# EAGLE board Stator_PCB_ver_2.2 (EAGLE 7.4.0)
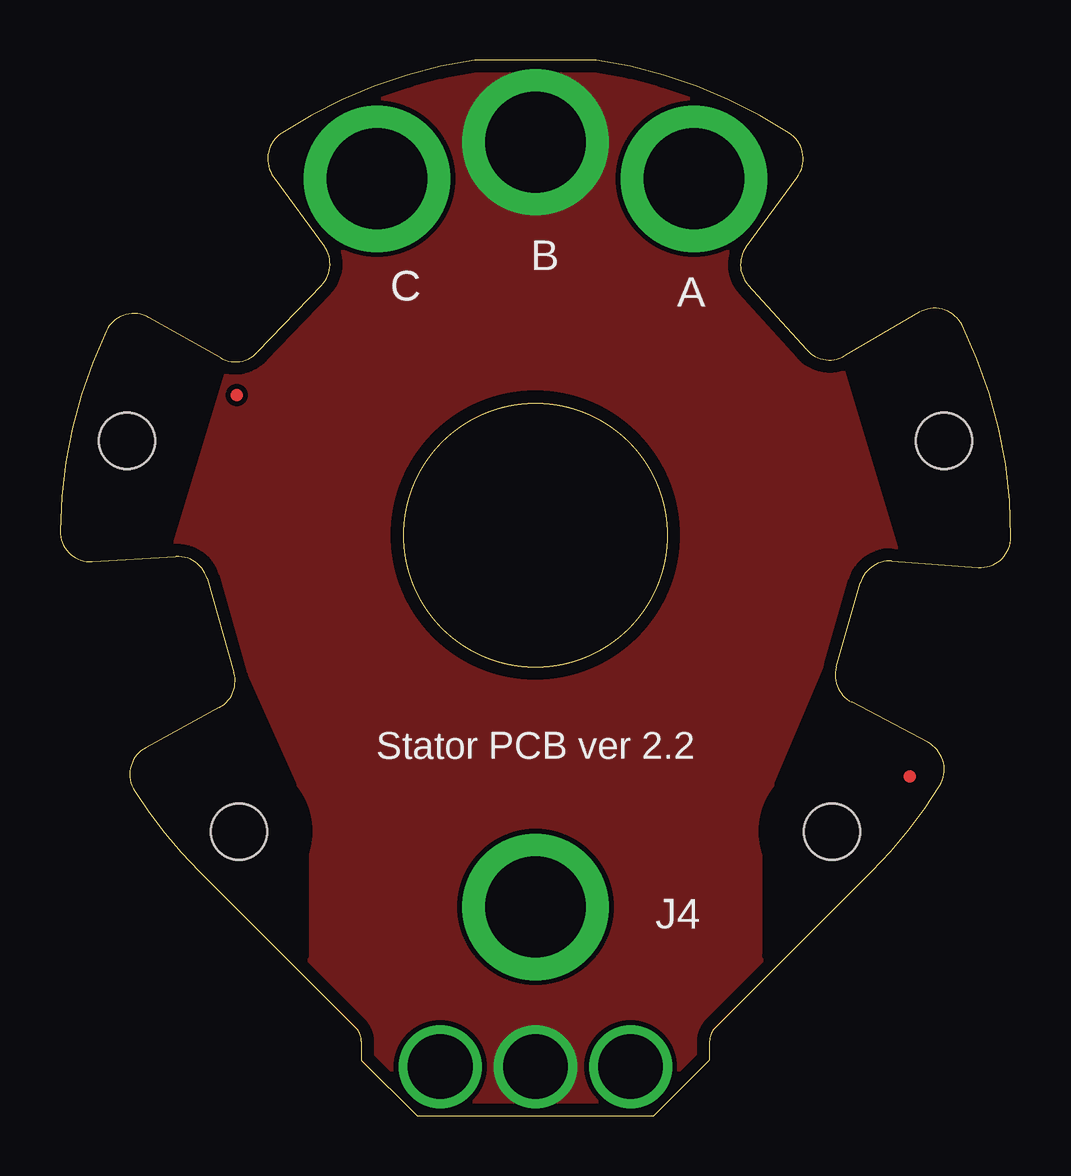
[diagram p0: board, top side]
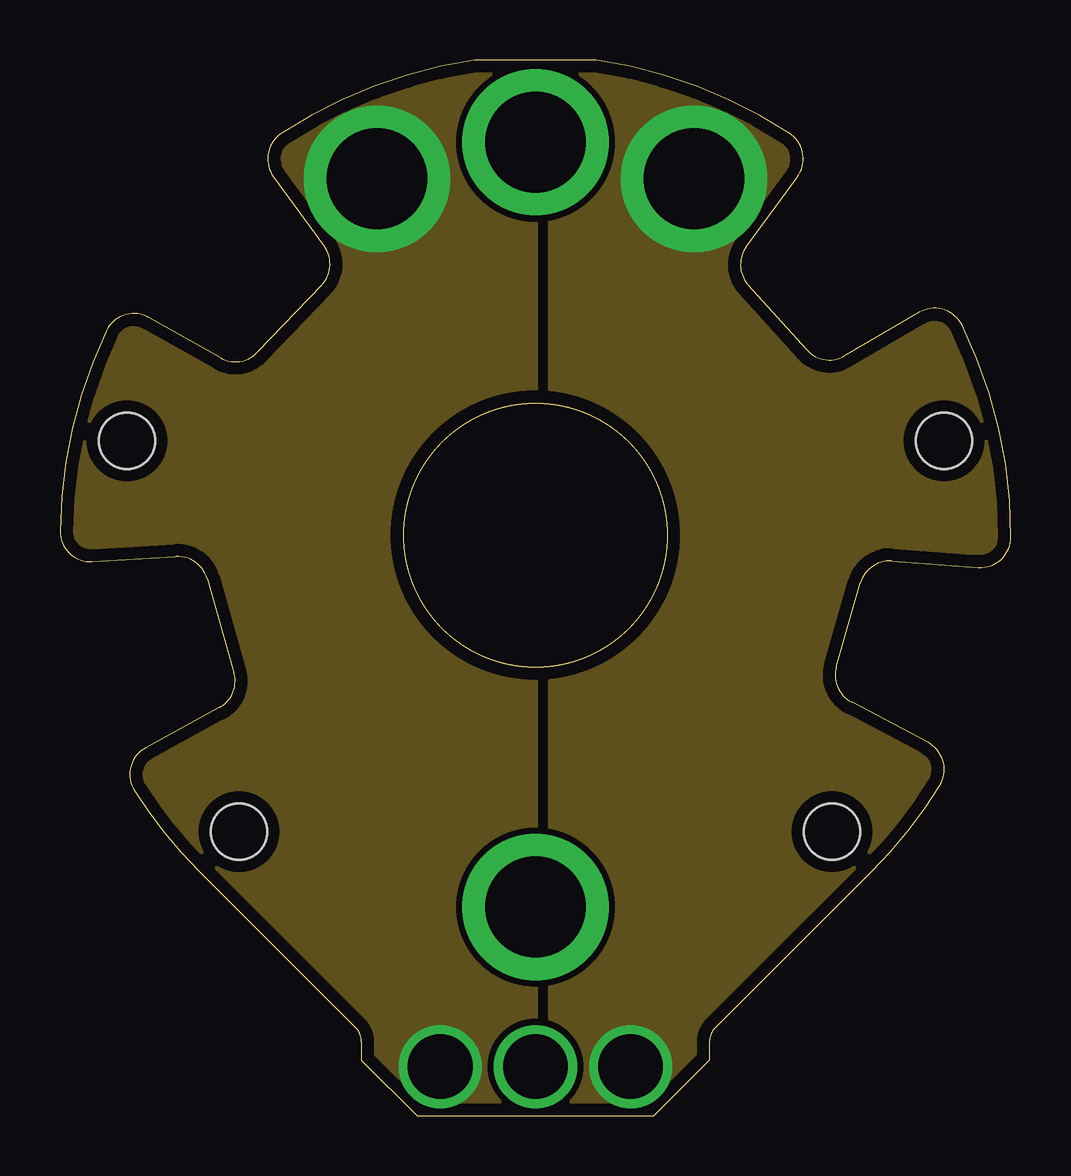
[diagram p1: board, inner layer Route2]
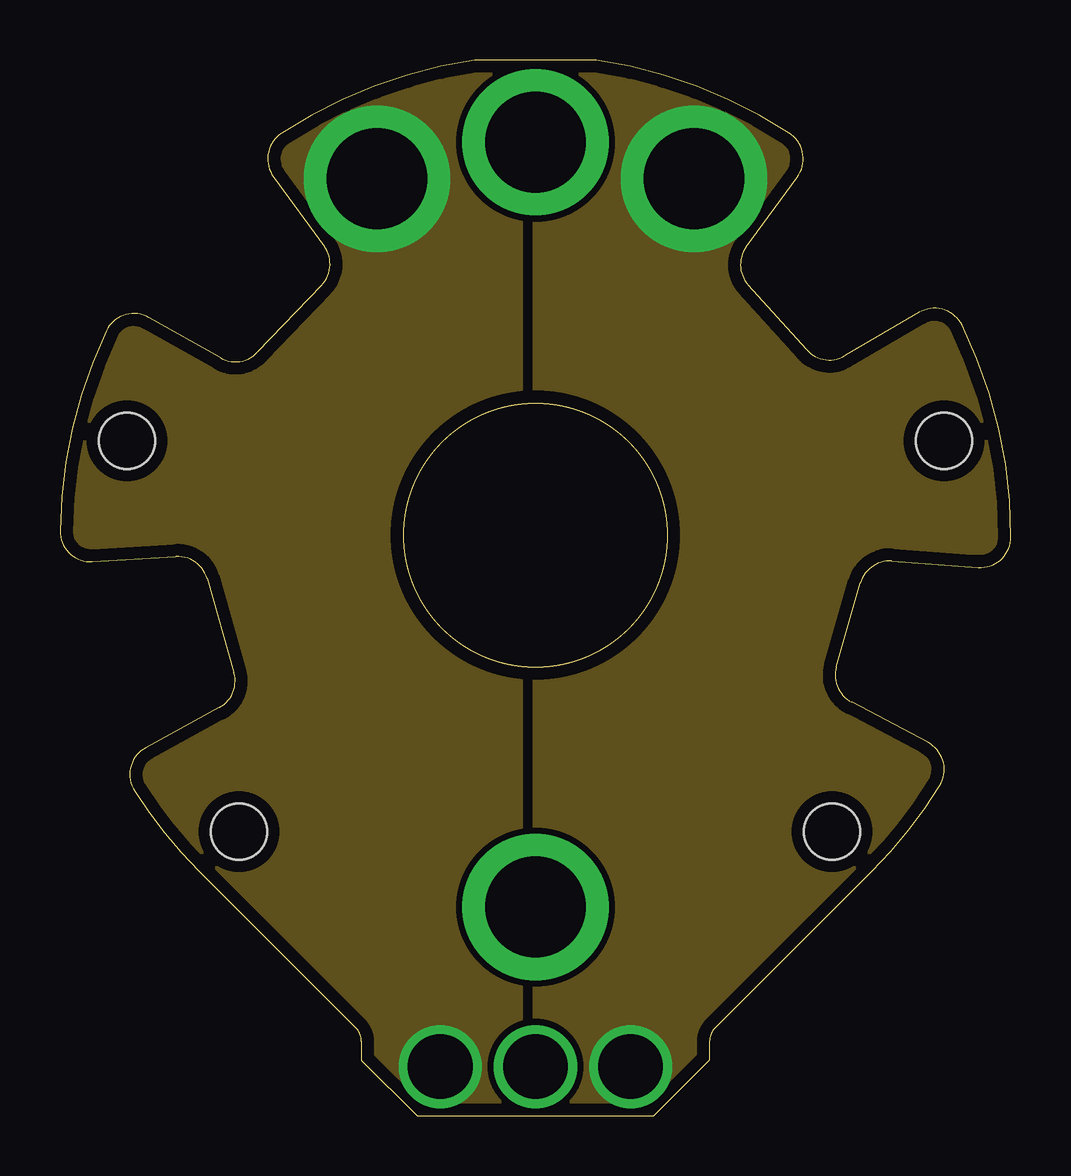
[diagram p2: board, inner layer Route3]
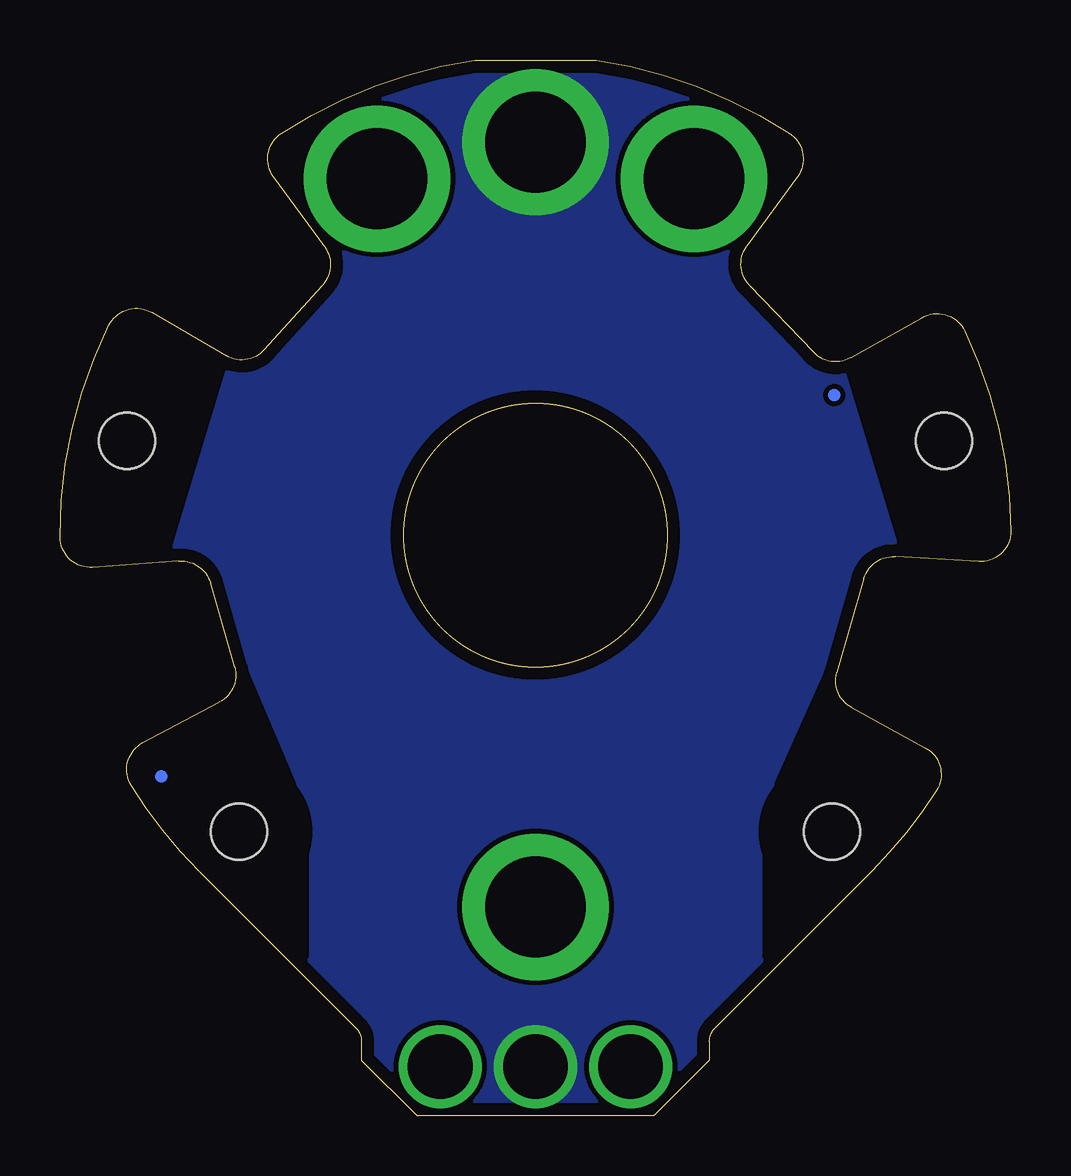
[diagram p3: board, bottom side, seen from below]

Size 39.62 x 44.01 mm. Coordinates in mm from the lower left corner, seen from the top.
Outline: 6.13,22.39 7.25,18.48 arc-77 6.64,17.01 3.57,15.34 arc94 3.11,13.54 arc12 5.8,10.19 12.33,3.66 arc-45 12.56,3.1 12.56,2.32 14.88,0 24.74,0 27.06,2.32 27.06,3.1 arc-45 27.29,3.66 33.82,10.19 arc13 36.65,13.76 arc94 36.17,15.55 32.98,17.24 arc-78 32.35,18.71 33.35,22.2 arc-78 34.67,23.12 38.26,22.86 arc94 39.62,24.12 arc26 37.58,32.95 arc94 35.81,33.49 32.69,31.68 arc-78 31.11,31.92 28.68,34.62 arc-78 28.6,36.22 30.72,39.13 arc94 30.38,40.96 arc24 22.35,44.01 17.27,44.01 arc24 9.25,40.96 arc94 8.9,39.13 11.01,36.25 arc-80 10.9,34.62 8.23,31.82 arc-76 6.68,31.59 3.7,33.27 arc94 1.93,32.72 arc25 0,24.38 0,24.37 arc93 1.35,23.1 4.83,23.31 arc-77 6.13,22.39
Outline: circle at 19.81,24.2 radius 5.5
Copper layers (1+2*3+16): Top 0.0711mm / dielectric 6mil / Route2 0.0711mm / dielectric 1mm / Route3 0.0711mm / dielectric 6mil / Bottom 0.0711mm
Design rules "default *": minimum track width 7mil, minimum drill 8mil, track to track 8mil, track to pad 8mil, pad to pad 8mil, via to via 8mil, smd to smd 8mil, copper to edge 20mil, drill to drill 8mil, minimum pad ring 5mil, minimum via ring 5mil, stop-mask expansion 2mil, vias tented up to drill 20mil, thermal gap 10mil
Holes 2.34 mm at 2.8,28.12 7.46,11.85 32.16,11.85 36.83,28.12
tRestrict: area 4.4,8.8 to 10.5,14.9; area -0.3,25.1 to 5.8,31.2; area 33.8,25.1 to 39.9,31.2; area 29.1,8.8 to 35.2,14.9; 6 lines
bRestrict: area -0.3,25.1 to 5.8,31.2; area 4.4,8.8 to 10.5,14.9; area 29.1,8.8 to 35.2,14.9; area 33.8,25.1 to 39.9,31.2; 6 lines

## Footprints (pad centres in the part's own frame; a part is rotated, then mirrored left to right if it is on the bottom)
4883 = drill 4.2 pad 6.1: P$1 0,0

## Placement (x,y rotation side)
A  48834883  [4883]  26.42,39.05 0 top
B  48834883  [4883]  19.81,40.58 0 top
C  48834883  [4883]  13.21,39.05 0 top
J4  48834883  [4883]  19.81,8.7 88 top
U$1  [20_MIL_FID]  35.4,14.14 0 top
U$2  [20_MIL_FID]  7.37,30.04 0 top

## Library data of the parts
A B C J4 = KEYSTONE
U$1 U$2 = fiducials

## Nets
A: A.P$1
B: B.P$1
C: C.P$1
NC: J4.P$1

## Tracks (layer width: path | path; a pad name or v marks a point on that pad's centre or on a via)
A  (via drill 2.7 pad 2.67)
  other vias: 23.77,2.05
  pour Route2 (isolate 0.254, no thermals): 46.48,50.23 46.48,-6.29 20.45,-6.29 20.45,50.23
  pour Route3 (isolate 0.254, no thermals): 46.48,50.23 46.48,-6.29 19.81,-6.29 19.81,50.23
B  (via drill 2.7 pad 2.67)
  other vias: 19.81,2.05
  pour Bottom (no thermals): -6.5,50.51 46.91,50.51 46.91,-6.54 -6.5,-6.54
  pour Top (no thermals): -7.11,50.41 -7.11,-6.89 46.28,-6.89 46.28,50.41
C  (via drill 2.7 pad 2.67)
  other vias: 15.85,2.05
  pour Route2 (isolate 0.254, no thermals): -6.22,50.23 19.81,50.23 19.81,-6.29 -6.22,-6.29
  pour Route3 (isolate 0.254, no thermals): -6.22,50.23 19.18,50.23 19.18,-6.29 -6.22,-6.29

## Text on the board
tPlace: Stator PCB ver 2.2
Panel: ROUTED AREA